# Altium PCB PCB2.PcbDoc
Units mil, origin at the board's own origin, x right, y up, seen from the top; angles counter-clockwise.
Board outline 3500 x 2390 mil, 2 copper layers (Top Layer, Bottom Layer); 45 components, 29 nets, 144 pads, 38 vias.
Unrouted connection lines stored in the file: 13.
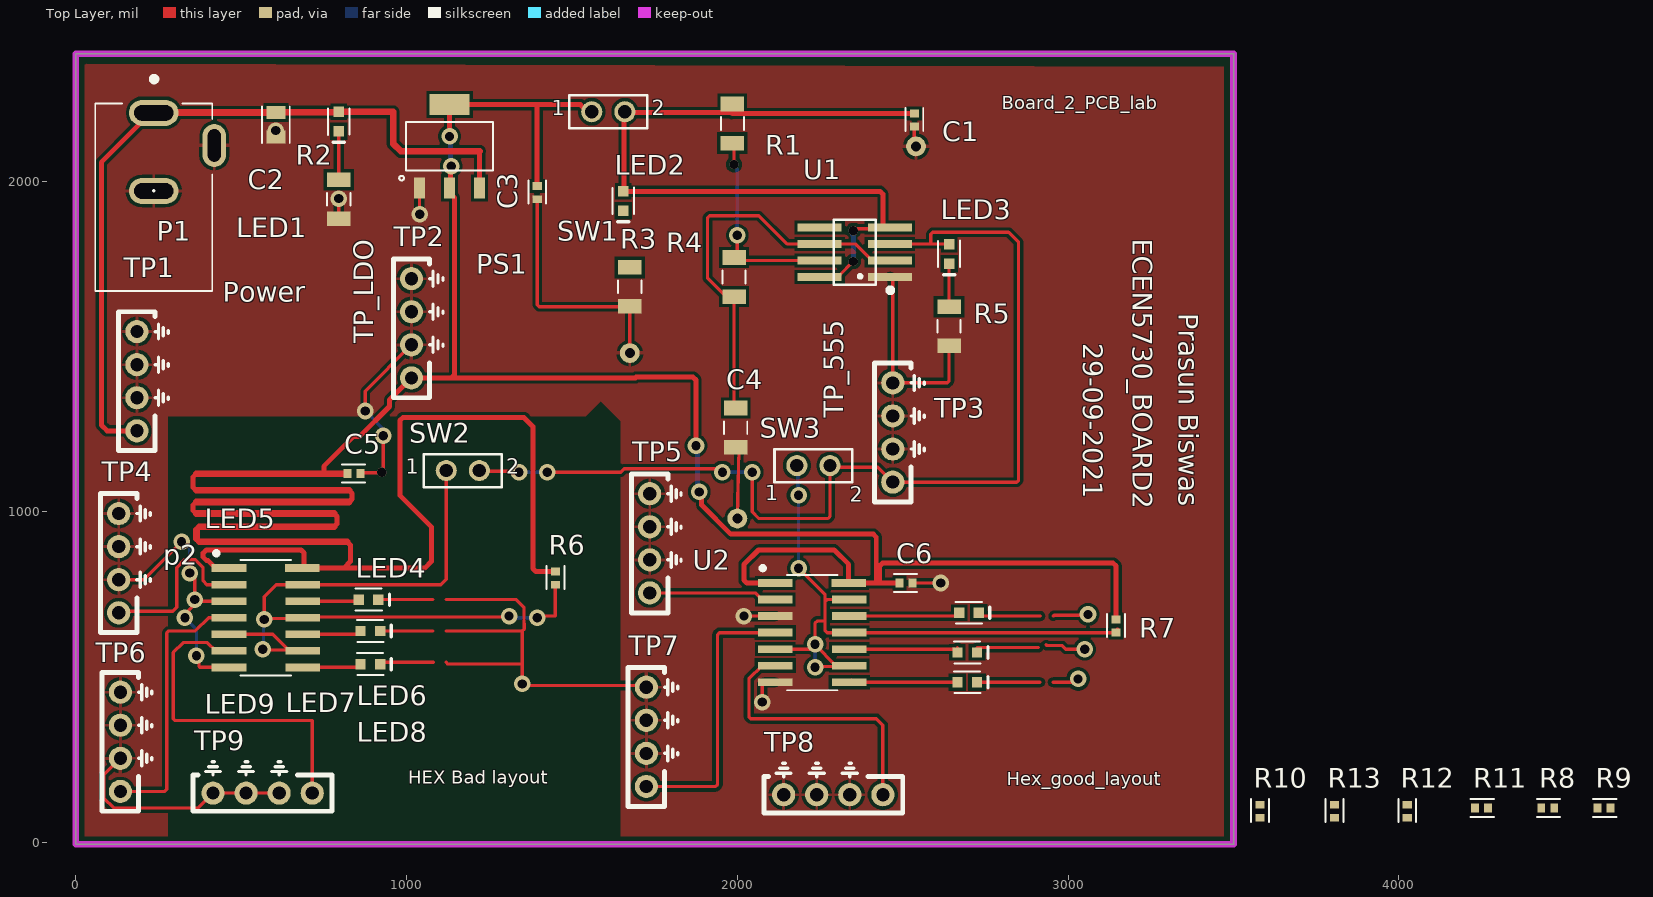
[diagram p0: Top Layer view]
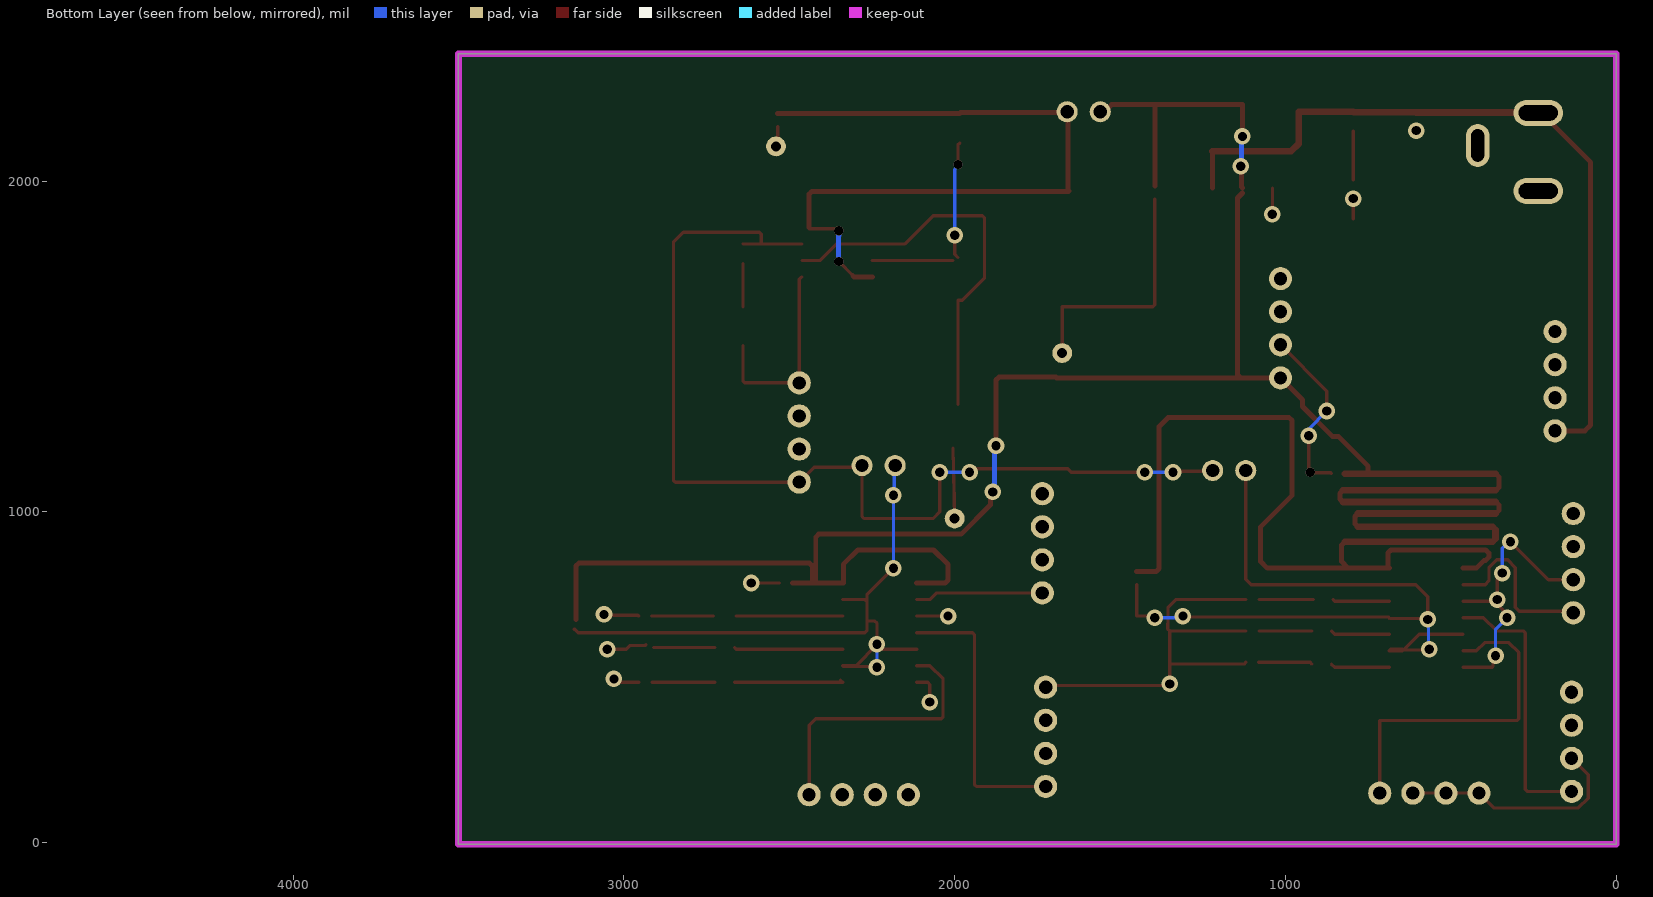
[diagram p1: Bottom Layer view, seen from below]

## Layer stack, top to bottom
Top Solder: solder mask 0.4, Solder Resist, Dk 3.5
Top Layer: signal copper 1.4
Dielectric 1: dielectric 12.6, FR-4, Dk 4.8
Bottom Layer: signal copper 1.4
Bottom Solder: solder mask 0.4, Solder Resist, Dk 3.5

## Board outline
0,-5 3500,-5 3500,2385 0,2385

## Design rules (kind name [scope] priority, off if disabled: settings)
BoardOutlineClearance [All] p1: gap=10 ignorepadtopadclearanceinfootprint=FALSE except(0: Arc-SplitContinuation Track-SplitContinuation SMDPad-SplitContinuation THPad-SplitContinuation Via-SplitContinuation Fill-SplitContinuation Poly-SplitContinuation Region-SplitContinuation Text-SplitContinuation)
Clearance [All] p1: gap=10 ignorepadtopadclearanceinfootprint=FALSE except(0: Arc-Hole Track-Hole SMDPad-Hole THPad-Hole Via-Hole Fill-Hole Poly-Hole Region-Hole Text-Hole)
PlaneClearance [All] p1: clearance=10
PlaneConnect [All] p1: planeconnectstyle=Direct reliefexpansion=20 reliefentries=4 reliefconductorwidth=10 reliefairgap=10
PolygonConnect [All] p1: thpad.connectstyle=Relief thpad.reliefconductorwidth=10 thpad.reliefentries=4 thpad.polygonreliefangle="90 Angle" thpad.airgapwidth=10 smdpad.connectstyle=Direct smdpad.reliefconductorwidth=10 smdpad.reliefentries=4 smdpad.polygonreliefangle="90 Angle" smdpad.airgapwidth=10 via.connectstyle=Direct via.reliefconductorwidth=10 via.reliefentries=4 via.polygonreliefangle="90 Angle" via.airgapwidth=10
RoutingVias [All] p1: holewidth=13 width=25 viastyle="Through Hole" minholewidth=13 minwidth=25 maxholewidth=60 maxwidth=80
SolderMaskExpansion [All] p1: expansion=4 istentingtop=FALSE
Width "Schematic Width Constraint_2" [InNet('LDO_OUT')] p1: maxlimit=100 minlimit=10 preferedwidth=20 minimp=50.000000 maximp=50.000000 favimp=50.000000
Width "Schematic Width Constraint_1" [InNet('3.3V')] p2: maxlimit=100 minlimit=10 preferedwidth=20 minimp=50.000000 maximp=50.000000 favimp=50.000000
Width "Schematic Width Constraint" [InNet('+5')] p3: maxlimit=100 minlimit=10 preferedwidth=20 minimp=50.000000 maximp=50.000000 favimp=50.000000
Width [All] p4: maxlimit=10 minlimit=10 preferedwidth=10
28 further rules are at their usual default settings.

## Classes and differential pairs
component class Sheet1: C1 C2 C3 C4 C5 C6 LED1 LED2 LED3 LED4 LED5 LED6 LED7 LED8 LED9 P1 p2 PS1 R1 R2 R3 R4 R5 R6 R7 SW1 SW2 SW3 TP1 TP2 TP3 TP4 TP5 TP6 TP7 TP8 TP9 U1 U2

## Components (designator, comment, footprint, x,y, rotation, side; value= is the part's Value field where it differs from the comment)
C1 "10uF" 0402_Passive_Capacitor 2535,2184.68 r90 top
C2 "22uF" 0805_Passive_Capaciitor 605,2170 r90 top
C3 "10uF" 0402_Passive_Capacitor 1395,1965 r90 top
C4 "1uF" 1206_Passive_Capacitor 1995,1255 r90 top
C5 "10uF" 0402_Passive_Capacitor 841.27,1115.95 r180 top
C6 "10uF" 0402_Passive_Capacitor 2510,785 r180 top
LED1 "KT-0603R" LED_0603 795,2180 r270 top value=Red
LED2 "KT-0603R" LED_0603 1655,1940 r270 top value=Red
LED3 "KT-0603R" LED_0603 2640,1780 r270 top value=Red
LED4 "KT-0603R" LED_0603 885.47,735 r0 top value=Red
LED5 "KT-0603R" LED_0603 2700,695 r0 top value=Red
LED6 "KT-0603R" LED_0603 890.47,640 r0 top value=Red
LED7 "KT-0603R" LED_0603 2695,575 r0 top value=Red
LED8 "KT-0603R" LED_0603 890.47,540 r0 top value=Red
LED9 "KT-0603R" LED_0603 2695,485 r0 top value=Red
P1 "Power Jack" Power_Jack 235.91,2206.22 r270 top value="CONN PWR JACK 2X5.5MM SOLDER"
p2 "74HC14D,653" HEX_74AC14 575,680 r0 top
PS1 "AMS1117-3.3" LDO 1130,2105 r0 top value="IC REG LINEAR 3.3V 800MA SOT223"
R1 "1k" 1206_Passive_Resitor 1985,2174 r90 top value="1K Ohm"
R2 "1k" 1206_Passive_Resitor 795,1945 r90 top value="1K Ohm"
R3 "1k" 1206_Passive_Resitor 1675,1680 r90 top value="1K Ohm"
R4 "1k" 1206_Passive_Resitor 1990,1710 r90 top value="1K Ohm"
R5 "1k" 1206_Passive_Resitor 2640,1561 r90 top value="1K Ohm"
R6 "10k" 0402_Passive_Resistor 1450,799.68 r90 top value=10KOhm
R7 "10k" 0402_Passive_Resistor 3145,655 r90 top value=10KOhm
R8 "50 Ohms" 0402_Passive_Resistor 4450,105 r0 top value=49.9Ohm
R9 "50 Ohms" 0402_Passive_Resistor 4620,105 r0 top value=49.9Ohm
R10 "50 Ohms" 0402_Passive_Resistor 3580,95 r90 top value=49.9Ohm
R11 "50 Ohms" 0402_Passive_Resistor 4250,105 r0 top value=49.9Ohm
R12 "50 Ohms" 0402_Passive_Resistor 4025,95 r90 top value=49.9Ohm
R13 "50 Ohms" 0402_Passive_Resistor 3805,95 r90 top value=49.9Ohm
SW1 "on_off_switch" 2Pin-Header-Conn 1560,2209.53 r0 top
SW2 "on_off_switch" 2Pin-Header-Conn 1120,1125 r0 top
SW3 "on_off_switch" 2Pin-Header-Conn 2180,1140 r0 top
TP1 "TP_5V" TP10x_Probe 185,1395 r90 top
TP2 "TP_5V" TP10x_Probe 1015,1555 r90 top
TP3 "TP_555_OUTPUT" TP10x_Probe 2470,1240 r90 top
TP4 "TP_555_OUTPUT" TP10x_Probe 130,845 r90 top
TP5 "TP_555_OUTPUT" TP10x_Probe 1735,905 r90 top
TP6 "TP_555_OUTPUT" TP10x_Probe 135,305 r90 top
TP7 "TP_555_OUTPUT" TP10x_Probe 1725,320 r90 top
TP8 "TP_555_OUTPUT" TP10x_Probe 2290,145 r180 top
TP9 "TP_555_OUTPUT" TP10x_Probe 565,150 r180 top
U1 "NE555DR" TS555IDTTR 2355,1785 r180 top
U2 "74HC14D,653" HEX_74AC14 2226.65,635 r0 top

## Footprints (in the part's own frame and the unit in brackets; to place one, negate y for a bottom-side part, rotate by r counter-clockwise, add the part's x,y. Pads: shape width x height; smd on the part's side, far side on the other; paste and mask are expansions set on the pad)
2Pin-Header-Conn [mm]
  round 1.62 hole 1.02: 1(0,0) 2(2.54,0)
  silkscreen extent -1.72,-1.27 4.26,1.26, body extent -1.27,-1.27 3.81,1.27, height 8.13
0402_Passive_Capacitor [mm] "Reference: https://www.worthingtonassembly.com/perfect-0402-footprint"
  rect 0.6x0.7 smd mask+0: 1(-0.5,0) 2(0.5,0)
  silkscreen extent -0.84,-0.69 0.94,0.69, body extent -0.5,-0.27 0.5,0.28, height 0.5
0402_Passive_Resistor [mm] "Reference: https://www.worthingtonassembly.com/perfect-0402-footprint"
  rect 0.6x0.7 smd mask+0: 1(-0.5,0) 2(0.5,0)
  silkscreen extent -0.84,-0.69 0.94,0.69, body extent -0.49,-0.25 0.51,0.25, height 0.4
0805_Passive_Capaciitor [mm] "Reference: http://livepartlibrary.com/fpdimensions.html"
  rect 1x1.45 smd mask+0: 1(-0.95,0) 2(0.95,0)
  silkscreen extent -1.4,-1.07 1.4,1.07, body extent -1.04,-0.62 0.96,0.63, height 1.4
1206_Passive_Capacitor [mil]
  rect 44x71 smd: 1(-59,0) 2(59,0)
  silkscreen extent -19,-35 19,35, body extent -63,-31 63,32, height 50
1206_Passive_Resitor [mil]
  rect 44x71 smd: 1(-59,0) 2(59,0)
  silkscreen extent -19,-35 19,35, body extent -61,-31 61,31, height 26
HEX_74AC14 [mm]
  rect 2.65x0.6 smd: 1(-2.836,3.81) 2(-2.836,2.54) 3(-2.836,1.27) 4(-2.836,0) 5(-2.836,-1.27) 6(-2.836,-2.54) 7(-2.836,-3.81) 8(2.836,-3.81) 9(2.836,-2.54) 10(2.836,-1.27) 11(2.836,0) 12(2.836,1.27) 13(2.836,2.54) 14(2.794,3.81)
  silkscreen extent -3.94,-4.43 1.95,5.08, body extent -3.18,-4.35 2.82,4.3, height 1.75
LDO [mil]
  rect 33x63 smd: 1(-91,-126) 2(0,-126) 3(91,-126)
  rect 122x63 smd: 4(0,126)
  silkscreen extent -152,-103 132,73, body extent -128,-144 128,132, height 73
LED_0603 [mm]
  rect 0.8x0.8 smd: 1(-0.75,0) 2(0.75,0)
  silkscreen extent -1.02,-0.84 1.6,0.84, body extent -0.84,-0.41 0.76,0.39, height 0.55
Power_Jack [mm]
  oval 2x3.8 hole 1.2 slot 3 at 90 deg: 1(0,0) 2(6,0)
  oval 3.3x1.8 hole 1 slot 2.5 at 0 deg: 3(2.5,4.65)
  silkscreen extent -2.79,-4.5 13.68,4.5, body extent -0.76,-4.45 13.64,4.95, height 11.49
TP10x_Probe [mil] "Small Probs footprint"
  round 70 hole 40: 1(-150,0) 2(-50,0) 2(50,0) 2(150,0)
  silkscreen extent -210,-95 210,55
TS555IDTTR [mm] "IC OSC Single Timer 2.7MHz 8SOIC"
  rect 3.4x0.6 smd: 1(-2.7,1.905) 2(-2.7,0.635) 3(-2.7,-0.635) 4(-2.7,-1.905) 5(2.7,-1.905) 6(2.7,-0.635) 7(2.7,0.635) 8(2.7,1.905)
  silkscreen extent -2.85,-2.5 1.6,3.05, body extent -3.03,-2.48 2.96,2.43, height 1.75

## Part data
C1 C3 C5 C6: library part C_10uF_0402, "10uF ±20% 6.3V X5R 0402 Multilayer Ceramic Capacitors MLCC - SMD/SMT RoHS", LCSC Part#=C15525, MFR Part #=CL05A106MQ5NUNC, Datasheet=https://datasheet.lcsc.com/lcsc/1810191215_Samsung-Electro-Mechanics-CL05A106MQ5NUNC_C15525.pdf, Type=Basic
C2: library part C_22uF_0805, "MULTILAYER CERAMIC CAPACITORS MLCC - SMD/SMT 22UF 25V 0805 ROHS", LCSC Part#=C45783, MFR Part #=CL21A226MAQNNNE, Datasheet=https://datasheet.lcsc.com/szlcsc/Samsung-Electro-Mechanics-CL21A226MAQNNNE_C45783.pdf, Type=Basic
C4: library part C_1uF_1206, "MULTILAYER CERAMIC CAPACITORS MLCC - SMD/SMT 1UF 50V 1206 ROHS", LCSC Part#=C1848, MFR Part #=CL31B105KBHNNNE, Digikey Link=https://www.digikey.com/product-detail/en/C1206C105M4RACTU/399-8150-1-ND/3471873/?itemSeq=304982366, Digikey Part=399-8150-1-ND, Type=Basic
LED1 LED2 LED3 LED4 LED5 LED6 LED7 LED8 LED9: library part LED_RED_0603, "LIGHT EMITTING DIODES (LED) RED 520~625NM 90~100MCD@20MA TOP VIEW 0603 ROHS", LCSC Part#=C2286, Datasheet=https://datasheet.lcsc.com/szlcsc/Everlight-Elec-19-217-BHC-ZL1M2RY-3T_C72041.pdf, MFR Part #=KT-0603R, Type=Basic
P1: library part "P_Power Jack", "Power Barrel Connector Jack 2.10mm ID (0.083\"), 5.50mm OD (0.217\") Through Hole, Right Angle", LCSC Part#=C136744, Digikey Link=https://www.digikey.com/product-detail/en/PJ-102A/CP-102A-ND/275425/?itemSeq=304982367, Digikey Part=CP-102A-ND, Type=Extended
p2 U2: library part U_7414_HC_Hex, "Inverter IC 6 Channel Schmitt Trigger 14-SOIC", LCSC Part#=C5605, Datasheet=https://datasheet.lcsc.com/szlcsc/ON-Semicon-ON-74AC14SCX_C5482.pdf, MFR Part #=74HC14D,653, Type=Basic
PS1: library part PS_AMS_LDO_3v3, "LOW DROPOUT REGULATORS(LDO) POSITIVE FIXED 1.3V @ 800MA 15V 3.3V 1A SOT-223 ROHS", LCSC Part#=C6186, MFR Part #=AMS1117-3.3, Type=Basic
R1 R2 R3 R4 R5: library part R_1K_1206, "CHIP RESISTOR - SURFACE MOUNT 1KOHMS ±1% 1/4W 1206 ROHS", LCSC Part#=C4410, MFR Part #=1206W4F1001T5, Digikey Link=https://www.digikey.com/product-detail/en/RNCP1206FTD1K00/RNCP1206FTD1K00CT-ND/2240675/?itemSeq=304982373, Digikey Part=RNCP1206FTD1K00CT-ND, Type=Basic
R6 R7: library part R_10KOhm_0402, "CHIP RESISTOR - SURFACE MOUNT 10KOHMS ±1% 1/16W 0402 ROHS", LCSC Part#=C25744, MFR Part #=0402WGF1002TCE, Datasheet=https://datasheet.lcsc.com/szlcsc/Uniroyal-Elec-0402WGF1002TCE_C25744.pdf, Type=Basic
R8 R9 R10 R11 R12 R13: library part R_50Ohm_0402, "CHIP RESISTOR - SURFACE MOUNT 49.9OHMS ±1% 1/16W 0402 ROHS", LCSC Part#=C25120, MFR Part #=0402WGF499JTCE, Datasheet=https://datasheet.lcsc.com/szlcsc/Uniroyal-Elec-0402WGF499JTCE_C25120.pdf, Type=Basic
SW1 SW2 SW3: library part SW_2Pin_100mil_Switch, "2Pin Header", LCSC Part#=C124375, Type=Extended
TP1 TP2 TP3 TP4 TP5 TP6 TP7 TP8 TP9: library part TP_10x_Probe, "Test Point 300 mil centers"
U1: library part U_555_Slow, "555 Timer SOIC-8_150MIL ROHS 150ns Rise Time", LCSC Part#=C7593, Digikey Link=https://www.digikey.com/product-detail/en/texas-instruments/NE555DR/296-6501-1-ND/372490, MFR Part #=NE555DR, Type=Basic

## Free pads (board coordinates)
  round 60 hole 30: 2(2540,2105) 5(1675,1480) 7(2000,980)

## Via types
v1: diameter 50, hole 28, Top Layer to Bottom Layer, 34 vias
v2: diameter 28, hole 28, Top Layer to Bottom Layer, 4 vias

## Nets (pads, with @x,y where several pads share a name; then routed paths per layer and width w, separated by ;. In a path a pad name is that pad's centre, name@x,y a point inside that pad or via, vN(x,y) a via of type N, cw(c..) or ccw(c..) an arc to the next point about the centre after c; other vN are vias at no path point)
3.3V: C3.2 C5.2 C6.2 p2.1 p2.14 PS1.2 PS1.4 R6.2 R7.2 SW1.1 TP2.1 U2.1 U2.14 | length 10758.3
  Top Layer w15: 363.79,995 355,1003.79 355,1021.21 363.79,1030 ; 363.79,1065 355,1073.79 355,1106.21 363.79,1115 ; 365,918.79 373.79,910 ; 365,946.21 373.79,955 ; p2.1 422.99,830 400.62,852.37 396.01,852.37 385.41,862.98 385.41,875.41 395,885 681.21,885 690,876.21 690,834.31 p2.14@685.69,830 ; p2.14 p2.14@685.69,830 ; 750,1115 750,1137.98 840.23,1228.21 858.31,1228.21 948.54,1318.44 948.54,1338.54 TP2.1 1135,1405 ; 781.21,955 790,963.79 790,986.21 781.21,995 ; 820,910 830,900 830,850 810,830 ; 826.21,1030 835,1038.79 835,1056.21 826.21,1065 ; PS1.2@1130,1964 1145,1949 1145,1415 1135,1405 ; PS1.2 1132.5,1981.5 1132.5,2042.5 v1(1135,2045) ; v1(1130,2135) PS1.4 1395,2231 ; C3.2 1395,2231 ; R6.2 1391.29,819.37 1382.5,828.16 1382.5,1257.5 1355,1285 988.79,1285 980,1276.21 980,1050 1075,955 1075,850 1055,830 810,830 ; SW1.1 1546.8,2209.53 1525.33,2231 1395,2231 ; v1(1875,1200) 1875,1398.71 1866.21,1407.5 1694.24,1407.5 1691.74,1405 1135,1405 ; v1(1885,1060.39) 1891.7,1053.7 1891.7,1021.13 1980.32,932.5 2411.21,932.5 2420,923.71 2420,795 2430,785 ; U2.1 2028.79,785 2020,793.79 2020,841.21 2063.79,885 2292.87,885 2336.65,841.21 U2.14 2430,785 ; C6.2 2430,785 ; R7.2 3145,836.21 3136.21,845 2438.79,845 2430,836.21 2430,785 ; p2.14@685.69,830 810,830
  Top Layer w20: 363.79,995 781.21,995 ; 363.79,1030 826.21,1030 ; 363.79,1065 826.21,1065 ; 363.79,1115 750,1115 C5.2@820.63,1115 ; 365,918.79 365,946.21 ; 373.79,910 820,910 ; 373.79,955 781.21,955
  Bottom Layer w15: v1(1130,2135) 1132.5,2132.5 1132.5,2047.5 v1(1135,2045) ; v1(1875,1200) 1880,1195 1880,1065.39 v1(1885,1060.39)
555_OUTPUT: LED3.1 SW2.2 SW3.2 TP3.1 U1.3 | length 3148.3
  Top Layer w10: SW2.2 1222.5,1122.5 1337.5,1122.5 v1(1340,1120) ; v1(1425,1120) 1647.54,1120 1657.54,1130 1934.18,1130 1944.18,1120 v1(1955,1120) ; v1(2045,1120) 2045,1000 2065,980 2274.14,980 2280,985.86 2280,1135 2425,1135 TP3.1 2844.14,1090 2850,1095.86 2850,1815 2820,1845 2590.86,1845 2585,1839.14 2585,1810 ; U1.3 2585,1810 ; LED3.1 2639.53,1810 2585,1810
  Bottom Layer w10: v1(1340,1120) v1(1425,1120) ; v1(1955,1120) v1(2045,1120)
+5: C2.2 LED1.1 P1.1 PS1.3 TP1.1 | length 2332.5
  Top Layer w15: TP1.1 95,1245 77.5,1262.5 77.5,2056.91 189.44,2168.85 226.81,2206.22 P1.1 245,2206.22 P1.1@246.18,2207.4 ; PS1.3 1221,2090
  Top Layer w20: P1.1@246.18,2207.4 C2.2 606.06,2208.46 793.94,2208.46 LED1.1 959.53,2209.53 959.53,2113.79 983.31,2090 1221,2090
GND: C1.1 C2.1 C3.1 C4.1 C5.1 C6.1 P1.2 P1.3 p2.3 p2.7 pad.2 pad.5 pad.7 PS1.1 R2.1 R3.1 R5.1 R8.2 R9.2 R10.2 R11.2 R12.2 R13.2 TP1.2 TP2.2 TP3.2 TP4.2 TP5.2 TP6.2 TP7.2 TP8.2 TP9.2 U1.1 U2.3 U2.7 | length 5464.3
  Top Layer w10: TP4.2@130,795 205,795 v1(320,910) ; TP6.2@135,255 85,205 85,134.29 114.29,105 370,105 415,150 515,150 TP9.2@615,150 ; v1(330,680) 330,690.82 352.35,713.17 352.35,727.35 v1(360,735) 360,800 v1(345,815) ; v1(365,565) 372.65,557.35 372.65,532.35 375,530 p2.7 ; v1@365,730 p2.3 ; P1.3@428.07,2068.07 P1.3@428.07,2107.8 ; C2.1 v1(605,2152.72) ; R2.1 v1(795,1947) ; C5.1 862.98,1117.98 922.98,1117.98 v2(925,1120) ; v1(875,1305) 875,1365 TP2.2@1015,1505 ; v2@930,1130 v1(930,1230) ; PS1.1 1039,1916 v1@1040,1915 ; 1119.37,640 1350,640 ; 1119.37,735 1331.57,735 1355,711.57 1355,663.43 1355.86,662.57 1355.86,645.86 1350,640 ; 1119.69,545 1124.69,540 1350,540 ; C3.1 1395,1625.86 1400.86,1620 1674,1620 R3.1 pad.5 ; TP7.2@1725,470 1720,475 1355,475 v1(1350,480) 1350,540 ; pad.7 C4.1@2005,1192 ; v1@2030,685 U2.3 ; v1@2075,440 2075,478.19 2081.81,485 U2.7 ; U1.1 2463.19,1710 2470,1703.19 2470,1390 2634.14,1390 2640,1395.86 R5.1 ; TP3.2@2469,1191 TP3.2@2470,1190 ; C6.1 v1(2615,785) ; pad.2@2535,2115 C1.1 ; 1350,540 1350,640
  Top Layer w15: P1.2@245,1970 P1.2@257.2,1982.2
  Bottom Layer w10: v1(320,910) 325,910 345,890 v1(345,815) ; v1(330,680) 365,645 v1(365,565) ; v1(875,1305) 930,1250 v1(930,1230)
  other v1: 2075,425 2020,685 1040,1900
LDO_OUT: C1.2 LED2.1 R1.2 SW1.2 U1.4 U1.8 | length 2319.1
  Top Layer w10: U1.8@2308.13,1714.58 v2(2350.63,1757.08) ; v2@2356.32,1855.69 U1.4@2440.09,1855.69
  Top Layer w15: LED2.1@1654.89,1970 1657.5,1972.61 1657.5,2200 1657.5,2204.53 1657.5,2207.03 SW1.2 ; LED2.1@1655.44,1969.09 2431.3,1969.09 2440.09,1960.3 U1.4@2440.09,1860 ; SW1.2@1665,2200 1665,2204.53 1662.76,2206.76 1982.24,2206.76 1985,2204 1985.18,2204.18 2534.81,2204.18 C1.2 ; U1.8 2303.82,1710 2308.13,1714.31 U1.8@2308.13,1714.58 ; v2(2350.63,1850) v2@2356.32,1855.69
  Bottom Layer w15: v2(2350.63,1757.08) 2350.63,1834.37 2349.03,1835.97 2349.03,1848.4 v2(2350.63,1850)
NetC4_2: C4.2 R4.1 U1.2 U1.6 | length 1215.8
  Top Layer w10: C4.2@1990,1325 1990,1640 1976.5,1640 1910,1706.5 1910,1889.14 1915.86,1895 2065,1895 2150,1810 U1.6 2357.81,1810 2357.81,1808.37 2406.18,1760 U1.2
NetLED1_2: LED1.2 R2.2 | length 146.5
  Top Layer w10: R2.2 LED1.2
NetLED3_2: LED3.2 R5.2 | length 130.5
  Top Layer w10: R5.2 LED3.2
NetLED4_1: LED4.1 p2.12 | length 171.4
  Top Layer w10: p2.12 850.94,730 LED4.1
NetLED4_2: LED4.2 R8.1 | length 165
  Top Layer w10: LED4.2 1080,735
NetLED5_1: LED5.1 U2.12 | length 321.7
  Top Layer w10: U2.12 LED5.1@2660,685
NetLED5_2: LED5.2 R9.1 | length 186.3
  Top Layer w10: LED5.2@2729.06,685 2915.32,685
NetLED6_1: LED6.1 p2.10 | length 178.4
  Top Layer w10: p2.10 850.94,630 LED6.1
NetLED6_2: LED6.2 R12.1 | length 160
  Top Layer w10: LED6.2 1080,640
NetLED7_1: LED7.1 U2.10 | length 329.2
  Top Layer w10: U2.10 2660.47,585 LED7.1@2665.47,590
NetLED7_2: LED7.2 R11.1 | length 185.8
  Top Layer w10: LED7.2@2724.53,590 2910.32,590
NetLED8_1: LED8.1 p2.8 | length 178.4
  Top Layer w10: p2.8 850.94,530 LED8.1
NetLED8_2: LED8.2 R10.1 | length 162.4
  Top Layer w10: LED8.2 925,545 1080.32,545
NetLED9_1: LED9.1 U2.8 | length 336.8
  Top Layer w10: U2.8@2345.12,491.81 U2.8 LED9.1
NetLED9_2: LED9.2 R13.1 | length 190.5
  Top Layer w10: LED9.2 2915,485
Netp2_2: p2.2 TP4.1 | length 524.6
  Top Layer w10: TP4.1 135,700 293.43,700 305,711.57 305,831.57 328.43,855 361.57,855 385,831.57 385,791.18 396.18,780 p2.2
Netp2_4: p2.4 TP6.1 | length 823.1
  Top Layer w10: TP6.1 269.14,155 275,160.86 275,634.14 280.86,640 361.57,640 401.57,680 p2.4
Netp2_5: p2.5 p2.9 p2.11 p2.13 R6.1 SW2.1 | length 2414.9
  Top Layer w10: p2.5 596.3,630 641.3,585 646.3,580 681.65,580 p2.9 681.65,585 646.3,585 643.8,582.5 567.5,582.5 v1(565,585) ; SW2.1 1120,795.86 1104.14,780 p2.13 605.86,780 570,744.14 v1(570,675) 572.5,677.5 684.15,677.5 689.15,682.5 1307.5,682.5 v1(1310,685) ; v1(1395,680) 1400,685 1450,685 R6.1
  Bottom Layer w10: v1(565,585) 567.5,587.5 567.5,672.5 v1(570,675) ; v1(1310,685) 1315,680 v1(1395,680)
Netp2_6: p2.6 TP9.1 | length 1032.7
  Top Layer w10: p2.6 422.99,580 397.99,605 325,605 295,575 295,375 300.86,369.14 715,369.14 TP9.1
NetR1_1: R1.1 R4.2 U1.7 | length 600.1
  Top Layer w10: R1.1 1990,2110 v2(1990,2050) ; R4.2 2000,1779 v1(2000,1836) ; R4.2@2005,1760 U1.7
  Bottom Layer w10: v2(1990,2050) 1990,2045.14 2000,2035.14 v1(2000,1836)
NetR7_1: R7.1 SW3.1 U2.5 U2.9 U2.11 U2.13 | length 2025
  Top Layer w10: U2.5 v1@2235,585 ; v1(2185,830) 2265.28,749.72 2265.28,729.14 ; v1(2235,530) 2237.5,532.5 2335.81,532.5 U2.9 2297.95,535 2235,597.95 v1(2235,600) 2235,664.14 2240.86,670 2265.28,670 ; U2.13 2271.14,735 2265.28,729.14 ; R7.1@3150,645.32 3148.03,645.32 3137.72,635 U2.11 2271.14,635 2265.28,640.86 2265.28,670 ; 2265.28,670 2265.28,729.14
  Bottom Layer w10: SW3.1 2182.5,1137.5 2182.5,1052.5 v1(2185,1050) v1(2185,830) ; v1(2235,530) v1(2235,600)
NetTP5_1: TP5.1 U2.2 | length 388.3
  Top Layer w10: TP5.1 2054.65,755 2074.65,735 U2.2
NetTP7_1: TP7.1 U2.4 | length 848.1
  Top Layer w10: TP7.1 1934.25,170 1940.11,175.86 1940.11,629.14 1945.97,635 U2.4
NetTP8_1: TP8.1 U2.6 | length 836.6
  Top Layer w10: U2.6 2074.65,535 2035,495.35 2035,380.86 2040.86,375 2420,375 2440,355 TP8.1
pads on no net: LED2.2 R3.2 U1.5
copper on no net: | length 297.3
  Top Layer w10: 2933.31,598.31 2935.81,595.81 2982.09,595.81 2992.9,585 v1(3050,585) ; 2954.37,485 3015,485 v1@3020,490 ; 2954.69,685 2957.19,687.5 3057.5,687.5 v1(3060,690)
  other v1: 3030,495

## Polygon pours and split planes (outlines as drawn)
GND on Top Layer "GND_L01_P001" (solid, pour order 1): 3469.99,2345.05 3469.99,20 130,20 28.04,20 28.04,-71.96 28.04,2354.96

## Keep-outs
Keep-Out Layer:
  lines w20: 0,385 0,2385 3500,2385 3500,385 ; 0,-5 0,2380 5,2385 3495,2385 3500,2380 3500,-5 0,-5

## Other copper
Top Layer:
  pour cut-out: 277.5,19.63 1647.5,19.63 1647.5,1274.63 1587.5,1334.63 1542.5,1289.63 277.5,1289.63 277.5,19.63 272.5,14.63

## Silkscreen, mask and mechanical layers (free items; w line width, h text height)
Top Overlay:
  text "Board_2_PCB_lab" at 2800,2216.66 h40
  text "ECEN5730_BOARD2" at 3195,1825 h60 r270
  text "Power" at 445,1635 h60
  text "Prasun Biswas" at 3335,1600 h60 r270
  text "TP_LDO" at 900,1510 h60 r90
  text "29-09-2021" at 3045,1510 h60 r270
  text "TP_555" at 2320,1285 h60 r90
  text "HEX Bad layout" at 1005,178.33 h40
  text "Hex_good_layout" at 2815,173.33 h40

## Text inside footprints (layer, text, board x,y; h text height)
SW1: Top Overlay "1" at 1438.35,2184.53 h77.5; Top Overlay "2" at 1741.14,2184.53 h77.5; Mechanical 16 "1" at 1438.35,2184.53 h77.5; Mechanical 16 "2" at 1741.14,2184.53 h77.5
SW2: Top Overlay "1" at 998.35,1100 h77.5; Top Overlay "2" at 1301.14,1100 h77.5; Mechanical 16 "1" at 998.35,1100 h77.5; Mechanical 16 "2" at 1301.14,1100 h77.5
SW3: Top Overlay "1" at 2085,1020 h77.5; Top Overlay "2" at 2340,1015 h77.5; Mechanical 16 "1" at 2055,1165 h77.5; Mechanical 16 "2" at 2370,1075 h77.5